# Altium PCB mamad_reza_shadman.PcbDoc
Units mm, origin at the board's own origin, x right, y up, seen from the top; angles counter-clockwise.
Board outline 95.83 x 53.21 mm, 2 copper layers (Top Layer, Bottom Layer); 28 components, 23 nets, 118 pads, 8 vias.
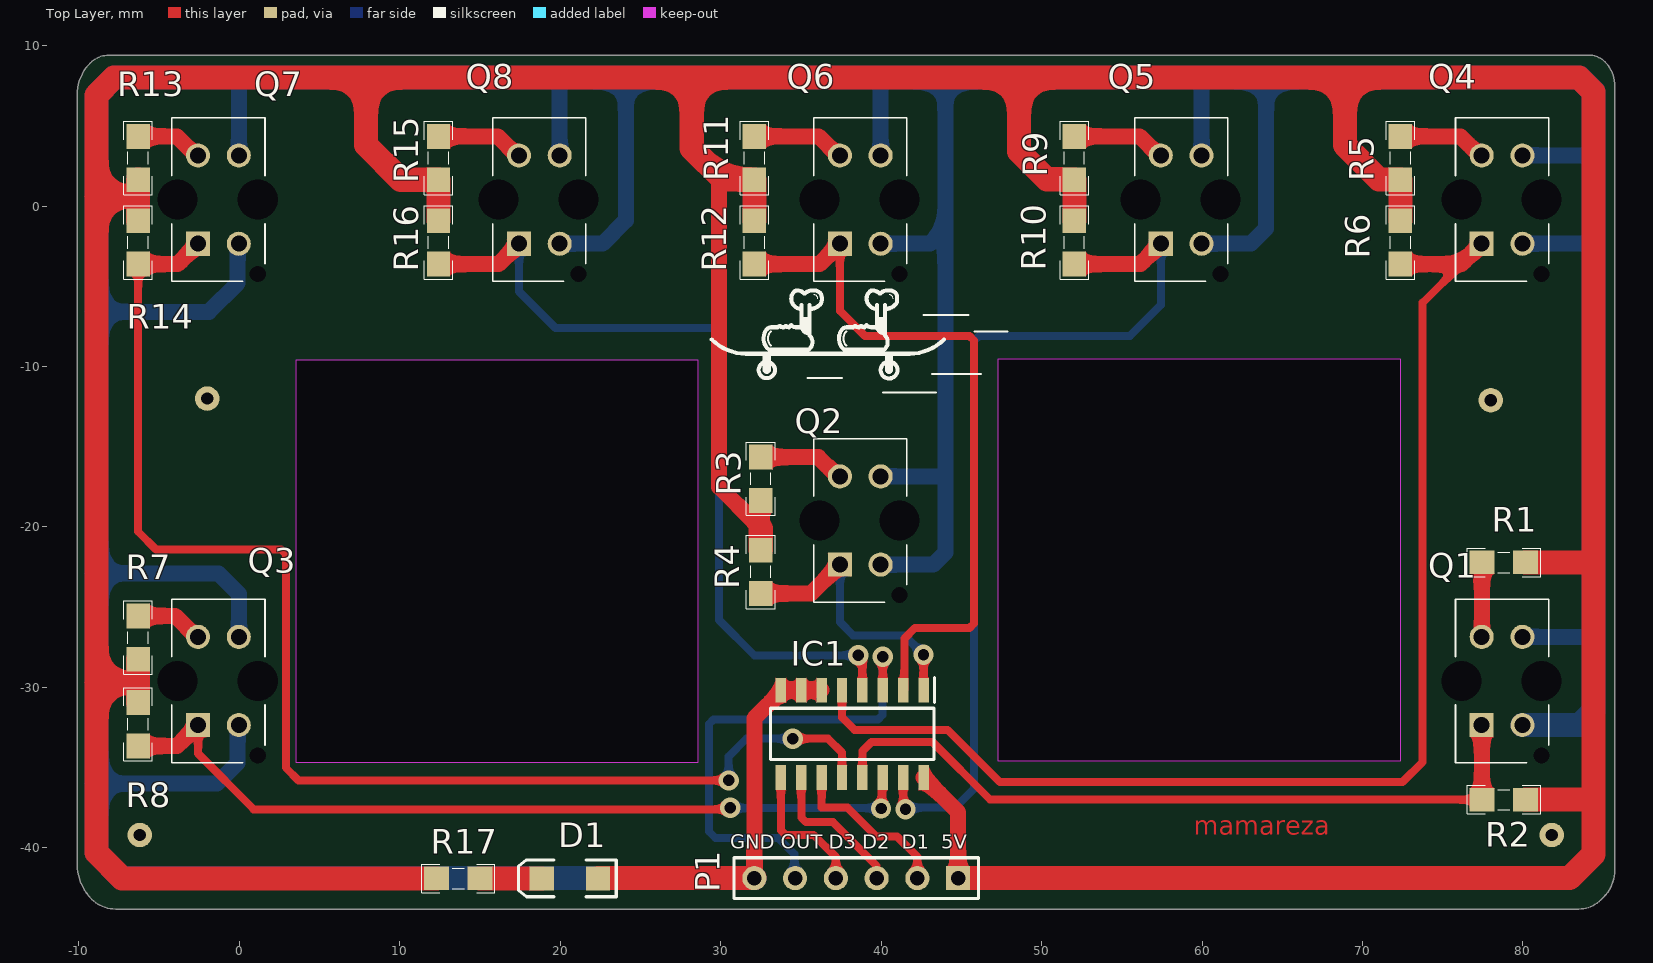
[diagram p0: Top Layer view]
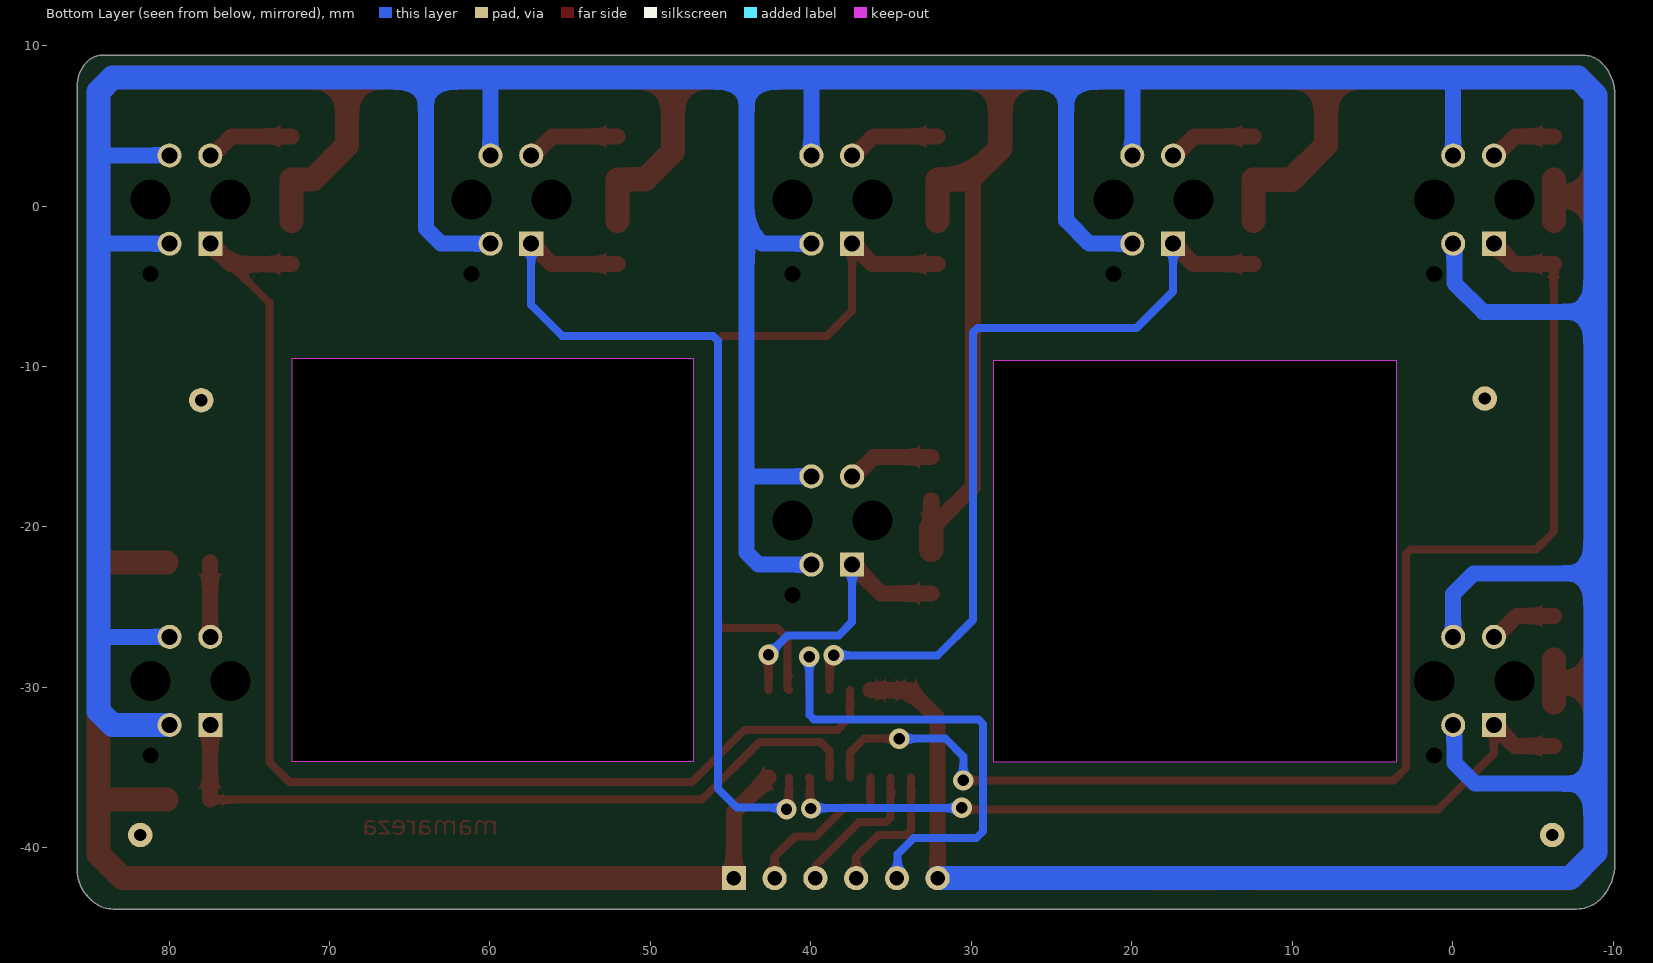
[diagram p1: Bottom Layer view, seen from below]
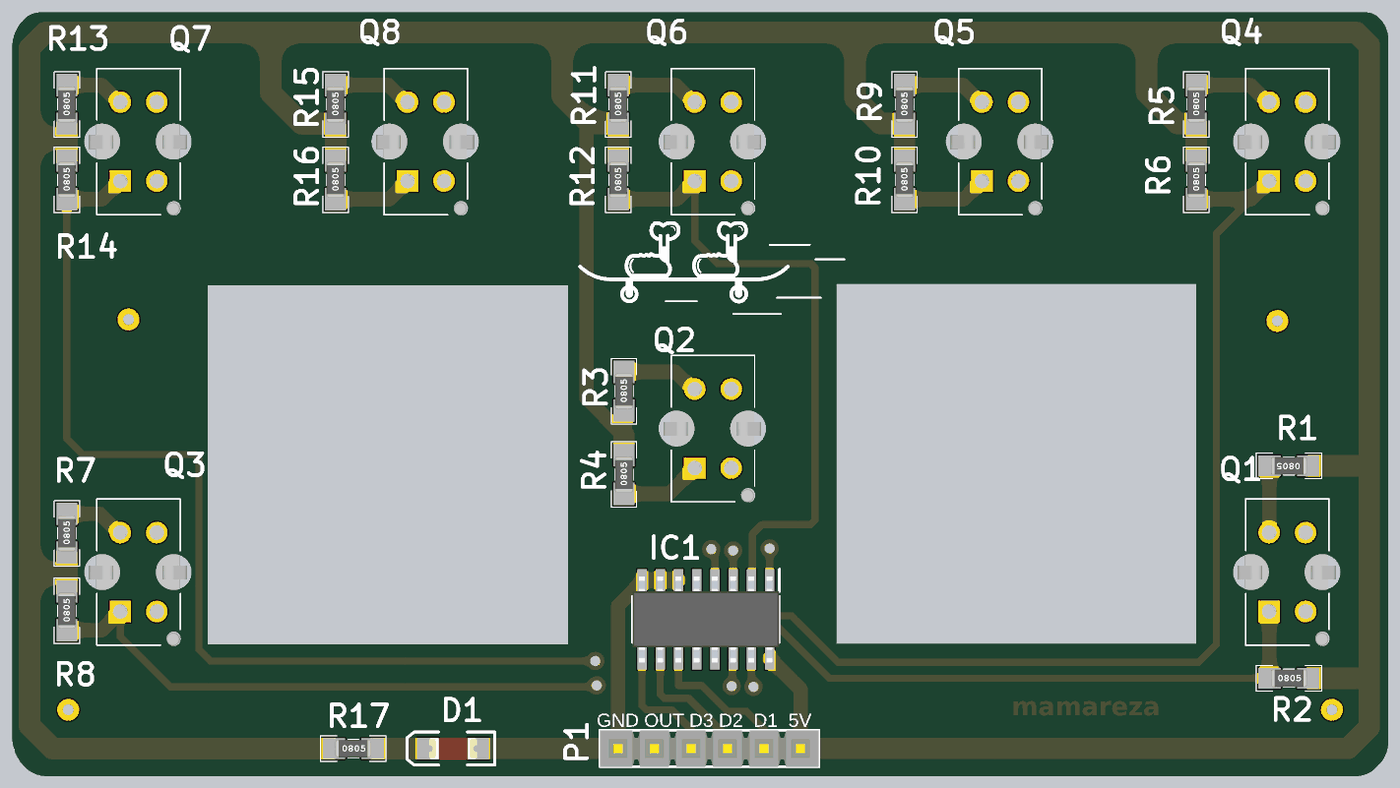
[diagram p2: 3D render of the assembled board from above, using the file's embedded part models]

## Layer stack, top to bottom
Top Solder: solder mask 0.0102, Solder Resist, Dk 3.5
Top Layer: signal copper 0.0356
Dielectric 1: dielectric 0.32, FR-4, Dk 4.8
Bottom Layer: signal copper 0.0356
Bottom Solder: solder mask 0.0102, Solder Resist, Dk 3.5

## Board outline
-9.202,-43.198 cw(c-7.034,-41.03) -10.1,-41.03 -10.1,6.93 cw(c-7.275,6.93) -9.273,8.927 cw(c-8.136,7.791) -8.136,9.398 -5,9.398 83.312,9.398 84.139,9.398 cw(c84.139,8.039) 85.1,9 cw(c83.591,7.491) 85.725,7.491 85.725,7.1 85.725,-41.402 cw(c83.376,-41.402) 85.037,-43.063 84.859,-43.241 cw(c83.474,-41.857) 83.474,-43.815 83.4,-43.815 -5.1,-43.815 -7.712,-43.815 cw(c-7.712,-41.709)
cut-out: 47.3,-9.506 72.36,-9.506 72.36,-34.6 47.3,-34.6
cut-out: 3.526,-9.6 3.526,-34.652 28.6,-34.652 28.6,-9.6

## Design rules (kind name [scope] priority, off if disabled: settings)
Clearance [All] p1: gap=0.254 ignorepadtopadclearanceinfootprint=FALSE except(0: Arc-Hole Track-Hole SMDPad-Hole THPad-Hole Via-Hole Fill-Hole Poly-Hole Region-Hole Text-Hole)
PolygonConnect [All] p1: connectstyle=Relief reliefconductorwidth=0.254 reliefentries=4 polygonreliefangle="90 Angle" airgapwidth=0.254
RoutingVias [All] p1: holewidth=0.711 width=1.27 viastyle="Through Hole" minholewidth=0.711 minwidth=1.27 maxholewidth=0.711 maxwidth=1.27
SolderMaskExpansion [All] p1: expansion=0.102 istentingtop=FALSE
Width [All] p1: maxlimit=2 minlimit=0.5 preferedwidth=1
30 further rules are at their usual default settings.

## Components (designator, comment, footprint, x,y, rotation, side; value= is the part's Value field where it differs from the comment)
D1 "SMD 1206 LED" "LED 1206" 20.6,-41.9 r180 top
IC1 "74HC4051D" SOIC127P600X175-16N 38.2,-32.9 r270 top
P1 "Header 6" HDR1X6 44.801,-41.891 r180 top
Q1 "TCRT5000" TCRT5000 78.7,-29.6 r90 top
Q2 "TCRT5000" TCRT5000 38.7,-19.6 r90 top
Q3 "TCRT5000" TCRT5000 -1.3,-29.6 r90 top
Q4 "TCRT5000" TCRT5000 78.7,0.4 r90 top
Q5 "TCRT5000" TCRT5000 58.7,0.4 r90 top
Q6 "TCRT5000" TCRT5000 38.7,0.4 r90 top
Q7 "TCRT5000" TCRT5000 -1.3,0.4 r90 top
Q8 "TCRT5000" TCRT5000 18.7,0.4 r90 top
R1 "220" RESC3413X04N 78.81,-22.206 r180 top
R2 "2.2K" RESC3413X04N 78.81,-37 r0 top
R3 "220" RESC3413X04N 32.5,-17 r90 top
R4 "2.2K" RESC3413X04N 32.5,-22.8 r90 top
R5 "220" RESC3413X04N 72.36,2.987 r90 top
R6 "2.2K" RESC3413X04N 72.36,-2.267 r90 top
R7 "220" RESC3413X04N -6.3,-26.9 r90 top
R8 "2.2K" RESC3413X04N -6.3,-32.3 r90 top
R9 "220" RESC3413X04N 52.04,2.987 r90 top
R10 "2.2K" RESC3413X04N 52.04,-2.267 r90 top
R11 "220" RESC3413X04N 32.101,2.987 r90 top
R12 "2.2K" RESC3413X04N 32.101,-2.267 r90 top
R13 "220" RESC3413X04N -6.3,2.987 r90 top
R14 "2.2K" RESC3413X04N -6.3,-2.267 r90 top
R15 "220" RESC3413X04N 12.416,2.987 r90 top
R16 "2.2K" RESC3413X04N 12.416,-2.267 r90 top
R17 "1K" RESC3413X04N 13.65,-41.9 r0 top

## Footprints (in the part's own frame and the unit in brackets; to place one, negate y for a bottom-side part, rotate by r counter-clockwise, add the part's x,y. Pads: shape width x height; smd on the part's side, far side on the other; paste and mask are expansions set on the pad)
HDR1X6 [mm] "Connector; Header; 6 Position"
  rect 1.5x1.5 hole 0.9: 1(0,0)
  round 1.5 hole 0.9: 2(2.54,0) 3(5.08,0) 4(7.62,0) 5(10.16,0) 6(12.7,0)
  silkscreen extent -1.27,-1.27 13.97,1.27, body extent -1.26,-1.25 13.98,1.29, height 8.38
"LED 1206" [mm]
  rect 1.5x1.5 smd: 1(-1.75,0) 2(1.75,0)
  silkscreen extent -2.9,-1.15 3.2,1.15, body extent -1.65,-0.72 1.65,0.73, height 1.36
RESC3413X04N [mm] "Chip Resistor, 2-Leads, Body 3/40x1/30mm, IPC Medium Density-Design:Abbas Basereh"
  rect 1.55x1.45 smd: 1(-1.35,0) 2(1.35,0)
  silkscreen extent -2.29,-0.89 2.29,0.89, body extent -1.25,-0.62 1.25,0.62, height 0.79
SOIC127P600X175-16N [mm]
  rect 1.55x0.65 smd: 1(-2.725,4.445) 2(-2.725,3.175) 3(-2.725,1.905) 4(-2.725,0.635) 5(-2.725,-0.635) 6(-2.725,-1.905) 7(-2.725,-3.175) 8(-2.725,-4.445) 9(2.725,-4.445) 10(2.725,-3.175) 11(2.725,-1.905) 12(2.725,-0.635) 13(2.725,0.635) 14(2.725,1.905) 15(2.725,3.175) 16(2.725,4.445)
  silkscreen extent -3.5,-5.1 1.6,5.12, body extent -3,-5.1 3,5.1, height 1.75
TCRT5000 [mm]
  rect 1.5x1.5 hole 1: 1(-2.75,1.27)
  round 1.5 hole 1: 2(-2.75,-1.27) 3(2.75,-1.27) 4(2.75,1.27)
  round 0.5 hole 1 unplated: MH1(-4.65,-2.45)
  round 1.25 hole 2.5 unplated: MH2(0,-2.45) MH3(0,2.54)
  silkscreen extent -5.1,-2.9 5.1,2.9, body extent -5.13,-3.35 5.07,3.45, height 1.73

## Part data
D1: library part "LED SMD 1206"
IC1: "Integrated Circuit", Manufacturer_Name=Nexperia, Mouser Part Number=N/A, Datasheet Link=https://assets.nexperia.com/documents/data-sheet/74HC_HCT4051.pdf, Height=1.75mm, Manufacturer_Part_Number=74HC4051D, Mouser Price/Stock=https://www.mouser.co.uk/ProductDetail/Nexperia/74HC4051D?qs=vHuUswq2%252Bswsg38emLDnpw%3D%3D
P1: "Header, 6-Pin", LatestRevisionDate=17-Jul-2002, LatestRevisionNote="Re-released for DXP Platform.", Publisher="Altium Limited"
Q1 Q2 Q3 Q4 Q5 Q6 Q7 Q8: "Transistor", Manufacturer_Name=Vishay, Mouser Part Number=782-TCRT5000, Arrow Part Number=TCRT5000, Arrow Price/Stock=https://www.arrow.com/en/products/tcrt5000/vishay?region=nac, Datasheet Link=http://www.vishay.com/docs/83760/tcrt5000.pdf, Height=6.8mm, Manufacturer_Part_Number=TCRT5000, Mouser Price/Stock=https://www.mouser.co.uk/ProductDetail/Vishay-Semiconductors/TCRT5000?qs=glpcD2KT6uaaYldHGIIt5g%3D%3D
R1 R2 R3 R4 R5 R6 R7 R8 R9 R10 R11 R12 R13 R14 R15 R16 R17: library part "RES 0805 0.125W", "RES 0805", Data=16-12-2016, Desc.="RES SMD 0805", Designer="Abbas Basereh"

## Free pads (board coordinates)
  round 1.524 hole 0.762: 1..5(-2,-12) 1..6(78,-12.1) 1..7(81.8,-39.2) 1..8(-6.2,-39.2)

## Via types
v1: diameter 1.27, hole 0.711, Top Layer to Bottom Layer, tented both sides, 8 vias

## Nets (pads, with @x,y where several pads share a name; then routed paths per layer and width w, separated by ;. In a path a pad name is that pad's centre, name@x,y a point inside that pad or via, vN(x,y) a via of type N, cw(c..) or ccw(c..) an arc to the next point about the centre after c; other vN are vias at no path point)
+5: IC1.16 P1.1 R1.1 R2.2 R3.1 R4.2 R5.1 R6.2 R7.1 R8.2 R9.1 R10.2 R11.1 R12.2 R13.1 R14.2 R15.1 R16.2 R17.1 | length 348.6
  Top Layer w1: 30.138,1.662 29.9,1.424 29.9,-17.5 32.5,-20.1 R3.1 ; R4.2@32.5,-21.5 R4.2 ; IC1.16 44.801,-37.781 P1.1
  Top Layer w1.5: R8.2 -6.3,-29.7 ; R7.1 -6.3,-29.7 ; R14.2 -6.3,0.6 ; R13.1 -6.3,0.6 ; R17.1 -7.3,-41.9 -8.9,-40.3 -8.9,-29.7 ; R16.2 R15.1 10.063,1.637 7.9,3.8 7.9,8 ; R12.2 R11.1 32.076,1.662 30.138,1.662 28.2,3.6 28.2,8 ; R4.2 32.5,-20.1 ; 45.7,-41.891 82.909,-41.891 84.4,-40.4 84.4,-37.3 ; R10.2 R9.1 52.015,1.662 50.338,1.662 48.6,3.4 48.6,8 ; R6.2 R5.1 72.335,1.662 71.038,1.662 68.9,3.8 68.9,8 ; R2.2 84.1,-37 84.4,-37.3 ; R1.1 84.394,-22.206 84.4,-22.2 ; -8.9,-29.7 -6.3,-29.7 ; -8.9,-29.7 -8.9,0.6 ; -8.9,0.6 -6.3,0.6 ; -8.9,0.6 -8.9,6.9 -7.8,8 7.9,8 ; 7.9,8 28.2,8 ; 28.2,8 48.6,8 ; 48.6,8 68.9,8 ; 68.9,8 83.5,8 84.4,7.1 84.4,-22.2 ; 84.4,-37.3 84.4,-22.2
a0: IC1.3 P1.5 | length 30.9
  Top Layer w0.5: v1(40.1,-28.1) 40.102,-28.103 40.102,-30.172 IC1.3
  Bottom Layer w0.5: P1.5 34.591,-41.841 34.591,-40.391 33.6,-39.4 29.693,-39.4 29.261,-38.968 29.261,-32.293 29.554,-32 39.807,-32 40.1,-31.707 v1(40.1,-28.1)
a1: IC1.13 Q1.1 R2.1 | length 46.7
  Top Layer w0.5: IC1.13@38.835,-35.625 38.835,-33.965 39.4,-33.4 43.2,-33.4 46.8,-37 R2.1
  Top Layer w1: Q1.1 77.445,-32.365 77.445,-36.985 R2.1
a2: IC1.14 Q3.1 R8.1 | length 52.1
  Top Layer w0.5: Q3.1 -2.57,-34.13 0.9,-37.6 30.5,-37.6 v1(30.6,-37.5) ; v1(39.997,-37.55) 40.051,-37.496 40.051,-35.679 IC1.14
  Top Layer w1: R8.1 -3.87,-33.65 Q3.1
  Bottom Layer w0.5: v1(30.6,-37.5) 30.625,-37.525 39.972,-37.525 v1(39.997,-37.55)
a3: IC1.15 Q5.1 R10.1 | length 57
  Top Layer w0.5: IC1.15 41.375,-37.456 v1(41.521,-37.601)
  Top Layer w1: R10.1 56.163,-3.617 Q5.1
  Bottom Layer w0.5: v1(41.521,-37.601) 41.622,-37.5 44.6,-37.5 45.8,-36.3 45.8,-8.393 46.093,-8.1 55.5,-8.1 57.43,-6.17 Q5.1
a4: IC1.12 Q7.1 R14.1 | length 82.9
  Top Layer w0.5: R14.1 -6.3,-20.3 -5.196,-21.404 2.611,-21.404 2.904,-21.697 2.904,-30.327 2.9,-30.331 2.9,-35.007 3.693,-35.8 v1(30.5,-35.8) ; v1(34.5,-33.2) 36.7,-33.2 37.565,-34.065 IC1.12
  Top Layer w1: R14.1 -3.837,-3.617 Q7.1
  Bottom Layer w0.5: v1(30.5,-35.8) 30.5,-34.3 31.6,-33.2 v1(34.5,-33.2)
a5: IC1.1 Q2.1 R4.1 | length 17.6
  Top Layer w0.5: IC1.1 v1(42.645,-27.955) v1@42.7,-27.9
  Top Layer w1: R4.1 35.63,-24.15 Q2.1
  Bottom Layer w0.5: Q2.1 37.43,-25.93 38.261,-26.761 41.451,-26.761 v1(42.645,-27.955)
a6: IC1.5 Q4.1 R6.1 | length 77.7
  Top Layer w0.5: IC1.5 37.565,-31.865 38.346,-32.646 44.146,-32.646 47.4,-35.9 72.5,-35.9 73.754,-34.646 73.754,-6.026 76.163,-3.617
  Top Layer w1: R6.1 76.163,-3.617 Q4.1
a7: IC1.2 Q6.1 R12.1 | length 44.8
  Top Layer w0.5: Q6.1 37.43,-6.53 39,-8.1 45.507,-8.1 45.8,-8.393 45.8,-26.007 45.507,-26.3 42.1,-26.3 41.45,-26.95 41.45,-30.1 IC1.2
  Top Layer w1: R12.1 36.163,-3.617 Q6.1
a8: IC1.4 Q8.1 R16.1 | length 51.8
  Top Layer w0.5: v1(38.579,-28) 38.579,-28.208 38.835,-28.464 IC1.4
  Top Layer w1: R16.1 16.163,-3.617 Q8.1
  Bottom Layer w0.5: Q8.1 17.43,-5.33 19.7,-7.6 29.607,-7.6 29.9,-7.893 29.9,-25.8 32.1,-28 v1(38.579,-28)
d1: IC1.11 P1.2 | length 10.4
  Top Layer w0.5: IC1.11 36.295,-37.5 37.899,-37.5 39.699,-39.3 41,-39.3 42.261,-40.561 P1.2
d2: IC1.10 P1.3 | length 9.2
  Top Layer w0.5: IC1.10 35.025,-38.107 35.318,-38.4 37,-38.4 39.721,-41.121 P1.3
d3: IC1.9 P1.4 | length 8.7
  Top Layer w0.5: IC1.9 33.755,-38.907 34.048,-39.2 35.8,-39.2 37.181,-40.581 P1.4
GND: D1.1 IC1.6 IC1.7 IC1.8 P1.6 Q1.2 Q1.3 Q2.2 Q2.3 Q3.2 Q3.3 Q4.2 Q4.3 Q5.2 Q5.3 Q6.2 Q6.3 Q7.2 Q7.3 Q8.2 Q8.3 | length 389.7
  Top Layer w1: P1.6 32.101,-31.929 33.855,-30.175 IC1.6
  Top Layer w1.5: D1.1@22.35,-41.891 P1.6
  Bottom Layer w1: -8.9,-36 -1.4,-36 -0.104,-34.704 -0.104,-32.424 Q3.2 ; -8.9,-22.9 -1.3,-22.9 -0.03,-24.17 Q3.3 ; -8.9,-6.6 -1.9,-6.6 -0.104,-4.804 -0.104,-2.424 Q7.2 ; -0.1,8 -0.03,7.93 Q7.3 ; Q8.2 22.65,-2.35 24.1,-0.9 24.1,8 ; Q8.3 19.97,7.87 20.1,8 ; Q2.2 43.25,-22.35 44,-21.6 44,-16.7 ; Q2.3 43.85,-16.85 44,-16.7 ; Q6.2 43.05,-2.35 44,-1.4 ; Q6.3 39.97,7.97 40,8 ; 44,8 44,-1.4 ; Q5.2 63.05,-2.35 64,-1.4 64,8 ; Q5.3 59.97,7.97 60,8 ; Q1.3 84.15,-26.85 84.4,-26.6 ; Q4.2 84.35,-2.35 84.4,-2.4 ; Q4.3 84.35,3.15 84.4,3.1 ; 44,-16.7 44,-1.4
  Bottom Layer w1.5: P1.6 -7.309,-41.891 -8.9,-40.3 -8.9,-36 -8.9,-22.9 -8.9,-6.6 -8.9,6.9 -7.8,8 -0.1,8 20.1,8 24.1,8 40,8 44,8 60,8 64,8 83.521,8 84.4,7.121 84.4,3.1 84.4,-2.4 84.4,-26.6 84.4,-31.471 83.521,-32.35 Q1.2
NetD1_2: D1.2 R17.2 | length 3.8
  Top Layer w1.5: R17.2 D1.2
NetQ1_4: Q1.4 R1.2 | length 4.7
  Top Layer w1: Q1.4 77.445,-26.835 77.445,-22.221 R1.2
NetQ2_4: Q2.4 R3.2 | length 5.4
  Top Layer w1: R3.2 36.095,-15.65 37.295,-16.85 Q2.4
NetQ3_4: Q3.4 R7.2 | length 4.3
  Top Layer w1: R7.2 -4.005,-25.55 -2.705,-26.85 Q3.4
NetQ4_4: Q4.4 R5.2 | length 5.6
  Top Layer w1: R5.2 76.108,4.337 77.295,3.15 Q4.4
NetQ5_4: Q5.4 R9.2 | length 5.9
  Top Layer w1: R9.2 56.108,4.337 57.295,3.15 Q5.4
NetQ6_4: Q6.4 R11.2 | length 5.8
  Top Layer w1: R11.2 36.108,4.337 37.295,3.15 Q6.4
NetQ7_4: Q7.4 R13.2 | length 4.2
  Top Layer w1: R13.2 -3.892,4.337 -2.705,3.15 Q7.4
NetQ8_4: Q8.4 R15.2 | length 5.5
  Top Layer w1: R15.2 16.108,4.337 17.295,3.15 Q8.4
pads on no net: Q1.MH1 Q1.MH2 Q1.MH3 Q2.MH1 Q2.MH2 Q2.MH3 Q3.MH1 Q3.MH2 Q3.MH3 Q4.MH1 Q4.MH2 Q4.MH3 Q5.MH1 Q5.MH2 Q5.MH3 Q6.MH1 Q6.MH2 Q6.MH3 Q7.MH1 Q7.MH2 Q7.MH3 Q8.MH1 Q8.MH2 Q8.MH3

## Other copper
Top Layer:
  text "mamareza" at 59.5,-39.583 h2

## Silkscreen, mask and mechanical layers (free items; w line width, h text height)
Top Overlay:
  circle w0.254: c32.875,-10.223 r0.508
  circle w0.254: c40.495,-10.223 r0.524
  lines w0.025: 35.198,-7.593 ccw(c35.415,-7.376) 35.415,-7.683 cw(c35.568,-7.53) 35.351,-7.53 35.351,-7.289 ; 39.733,-7.736 cw(c39.86,-7.863) 39.86,-7.683 40.114,-7.683 ; 40.051,-7.53 ccw(c40.051,-7.62) 39.987,-7.556 39.95,-7.519 ; 39.95,-7.519 ccw(c39.733,-7.736) 39.733,-7.429 cw(c39.733,-7.736) 39.95,-7.519 ; 39.95,-7.519 40.114,-7.683 ; 40.114,-7.683 ccw(c40.114,-7.683) 40.114,-7.683
  lines w0.076: 35.796,-5.524 cw(c35.796,-5.778) 36.05,-5.778 ; 40.495,-5.524 cw(c40.495,-5.778) 40.749,-5.778
  lines w0.127: 33.129,-8.699 cw(c33.573,-8.254) 33.129,-7.81 ; 35.415,-10.731 37.574,-10.731 ; 37.828,-8.699 cw(c38.272,-8.254) 37.828,-7.81 ; 40.114,-11.62 43.416,-11.62 ; 42.654,-6.794 45.448,-6.794 ; 43.162,-10.477 46.21,-10.477 ; 45.829,-7.81 47.861,-7.81
  lines w0.254: 29.446,-8.318 ccw(c31.592,-6.172) 31.592,-9.207 ; 34.907,-7.556 34.706,-7.556 cw(c34.706,-7.122) 34.399,-7.429 34.272,-7.556 cw(c34.272,-7.249) 34.055,-7.466 34.018,-7.503 cw(c33.891,-7.376) 33.891,-7.556 cw(c33.891,-7.249) 33.674,-7.466 33.637,-7.503 cw(c33.51,-7.376) 33.51,-7.556 33.182,-7.556 ccw(c33.182,-7.99) 32.875,-7.683 ccw(c33.573,-8.254) 33.002,-8.953 35.489,-8.953 35.542,-8.9 ccw(c35.124,-8.482) 35.542,-8.064 ; 35.034,-6.413 cw(c35.034,-5.8) 34.6,-6.233 34.579,-6.212 cw(c35.012,-5.778) 34.399,-5.778 cw(c35.012,-5.778) 34.579,-5.344 cw(c34.758,-5.524) 34.758,-5.27 cw(c34.758,-5.936) 35.229,-5.465 cw(c35.7,-5.936) 35.7,-5.27 35.87,-5.27 cw(c35.87,-5.704) 36.177,-5.397 cw(c35.87,-5.704) 36.304,-5.704 36.304,-5.852 cw(c35.87,-5.852) 36.177,-6.159 cw(c35.564,-5.546) 35.564,-6.413 35.542,-6.413 ; 35.034,-6.159 35.034,-7.429 ccw(c35.542,-7.429) 35.542,-7.937 ; 35.161,-7.07 ccw(c36.028,-7.07) 35.415,-7.683 ; 35.161,-7.048 35.542,-7.048 ; 35.198,-7.593 ccw(c35.415,-7.376) 35.415,-7.683 ; 35.245,-7.547 ccw(c34.987,-7.289) 35.351,-7.289 ; 35.351,-7.048 35.351,-7.53 ccw(c35.568,-7.53) 35.415,-7.683 ; 35.452,-7.72 cw(c35.235,-7.937) 35.542,-7.937 ; 35.542,-6.159 35.542,-7.937 ; 39.606,-7.556 39.405,-7.556 cw(c39.405,-7.122) 39.098,-7.429 38.971,-7.556 cw(c38.971,-7.249) 38.754,-7.466 38.717,-7.503 cw(c38.59,-7.376) 38.59,-7.556 cw(c38.59,-7.249) 38.373,-7.466 38.336,-7.503 cw(c38.209,-7.376) 38.209,-7.556 37.881,-7.556 ccw(c37.881,-7.99) 37.574,-7.683 ccw(c38.272,-8.254) 37.701,-8.953 40.188,-8.953 40.241,-8.9 ccw(c39.823,-8.482) 40.241,-8.064 ; 39.733,-6.413 cw(c39.733,-5.8) 39.299,-6.233 39.278,-6.212 cw(c39.711,-5.778) 39.098,-5.778 cw(c39.711,-5.778) 39.278,-5.344 cw(c39.457,-5.524) 39.457,-5.27 cw(c39.457,-5.936) 39.928,-5.465 cw(c40.399,-5.936) 40.399,-5.27 40.569,-5.27 cw(c40.569,-5.704) 40.876,-5.397 cw(c40.569,-5.704) 41.003,-5.704 41.003,-5.852 cw(c40.569,-5.852) 40.876,-6.159 cw(c40.263,-5.546) 40.263,-6.413 40.241,-6.413 ; 39.733,-6.159 39.733,-7.429 ccw(c40.241,-7.429) 40.241,-7.937 40.241,-6.159 ; 39.806,-7.691 cw(c39.826,-7.711) 39.826,-7.683 40.114,-7.683 ; 39.86,-7.07 ccw(c40.727,-7.07) 40.114,-7.683 ; 39.86,-7.048 40.241,-7.048 ; 40.05,-7.048 40.051,-7.53 ccw(c40.267,-7.53) 40.114,-7.683 ; 43.911,-8.318 cw(c41.765,-6.172) 41.765,-9.207 31.605,-9.207 ; 31.592,-9.207 31.605,-9.207 ; 31.592,-9.207 31.605,-9.207 ; 35.034,-8.953 ccw(c35.034,-8.953) 35.034,-8.953 ; 39.733,-8.953 ccw(c39.733,-8.953) 39.733,-8.953
  lines w0.508: 32.875,-10.223 32.875,-9.334 ; 40.495,-10.223 40.495,-9.969 40.495,-9.334
  text "GND OUT D3 D2  D1  5V" at 30.6,-40.383 h1.5
Mechanical 1:
  lines w0.254: -10.1,-41.03 ccw(c-7.034,-41.03) -9.202,-43.198 ccw(c-7.712,-41.709) -7.712,-43.815 -5.395,-43.815 -5.1,-43.815 83.4,-43.815 83.474,-43.815 ccw(c83.474,-41.857) 84.859,-43.241 85.037,-43.063 ccw(c83.376,-41.402) 85.725,-41.402 85.725,7.1 85.725,7.491 ccw(c83.591,7.491) 85.1,9 ccw(c84.139,8.039) 84.139,9.398 83.312,9.398 -5,9.398 -5.195,9.398 -8,9.398 -8.136,9.398 ccw(c-8.136,7.791) -9.273,8.927 ccw(c-7.275,6.93) -10.1,6.93 -10.1,-7.677 -10.1,-26.216 -10.1,-41.03